# Altium PCB diplom.PcbDoc (part 1 of 2)
Units mm, origin at the board's own origin, x right, y up, seen from the top; angles counter-clockwise.
Board outline 160 x 160 mm, 2 copper layers (Top Layer, Bottom Layer), stack 1.099 mm thick; 231 components, 171 nets, 635 pads, 180 vias.
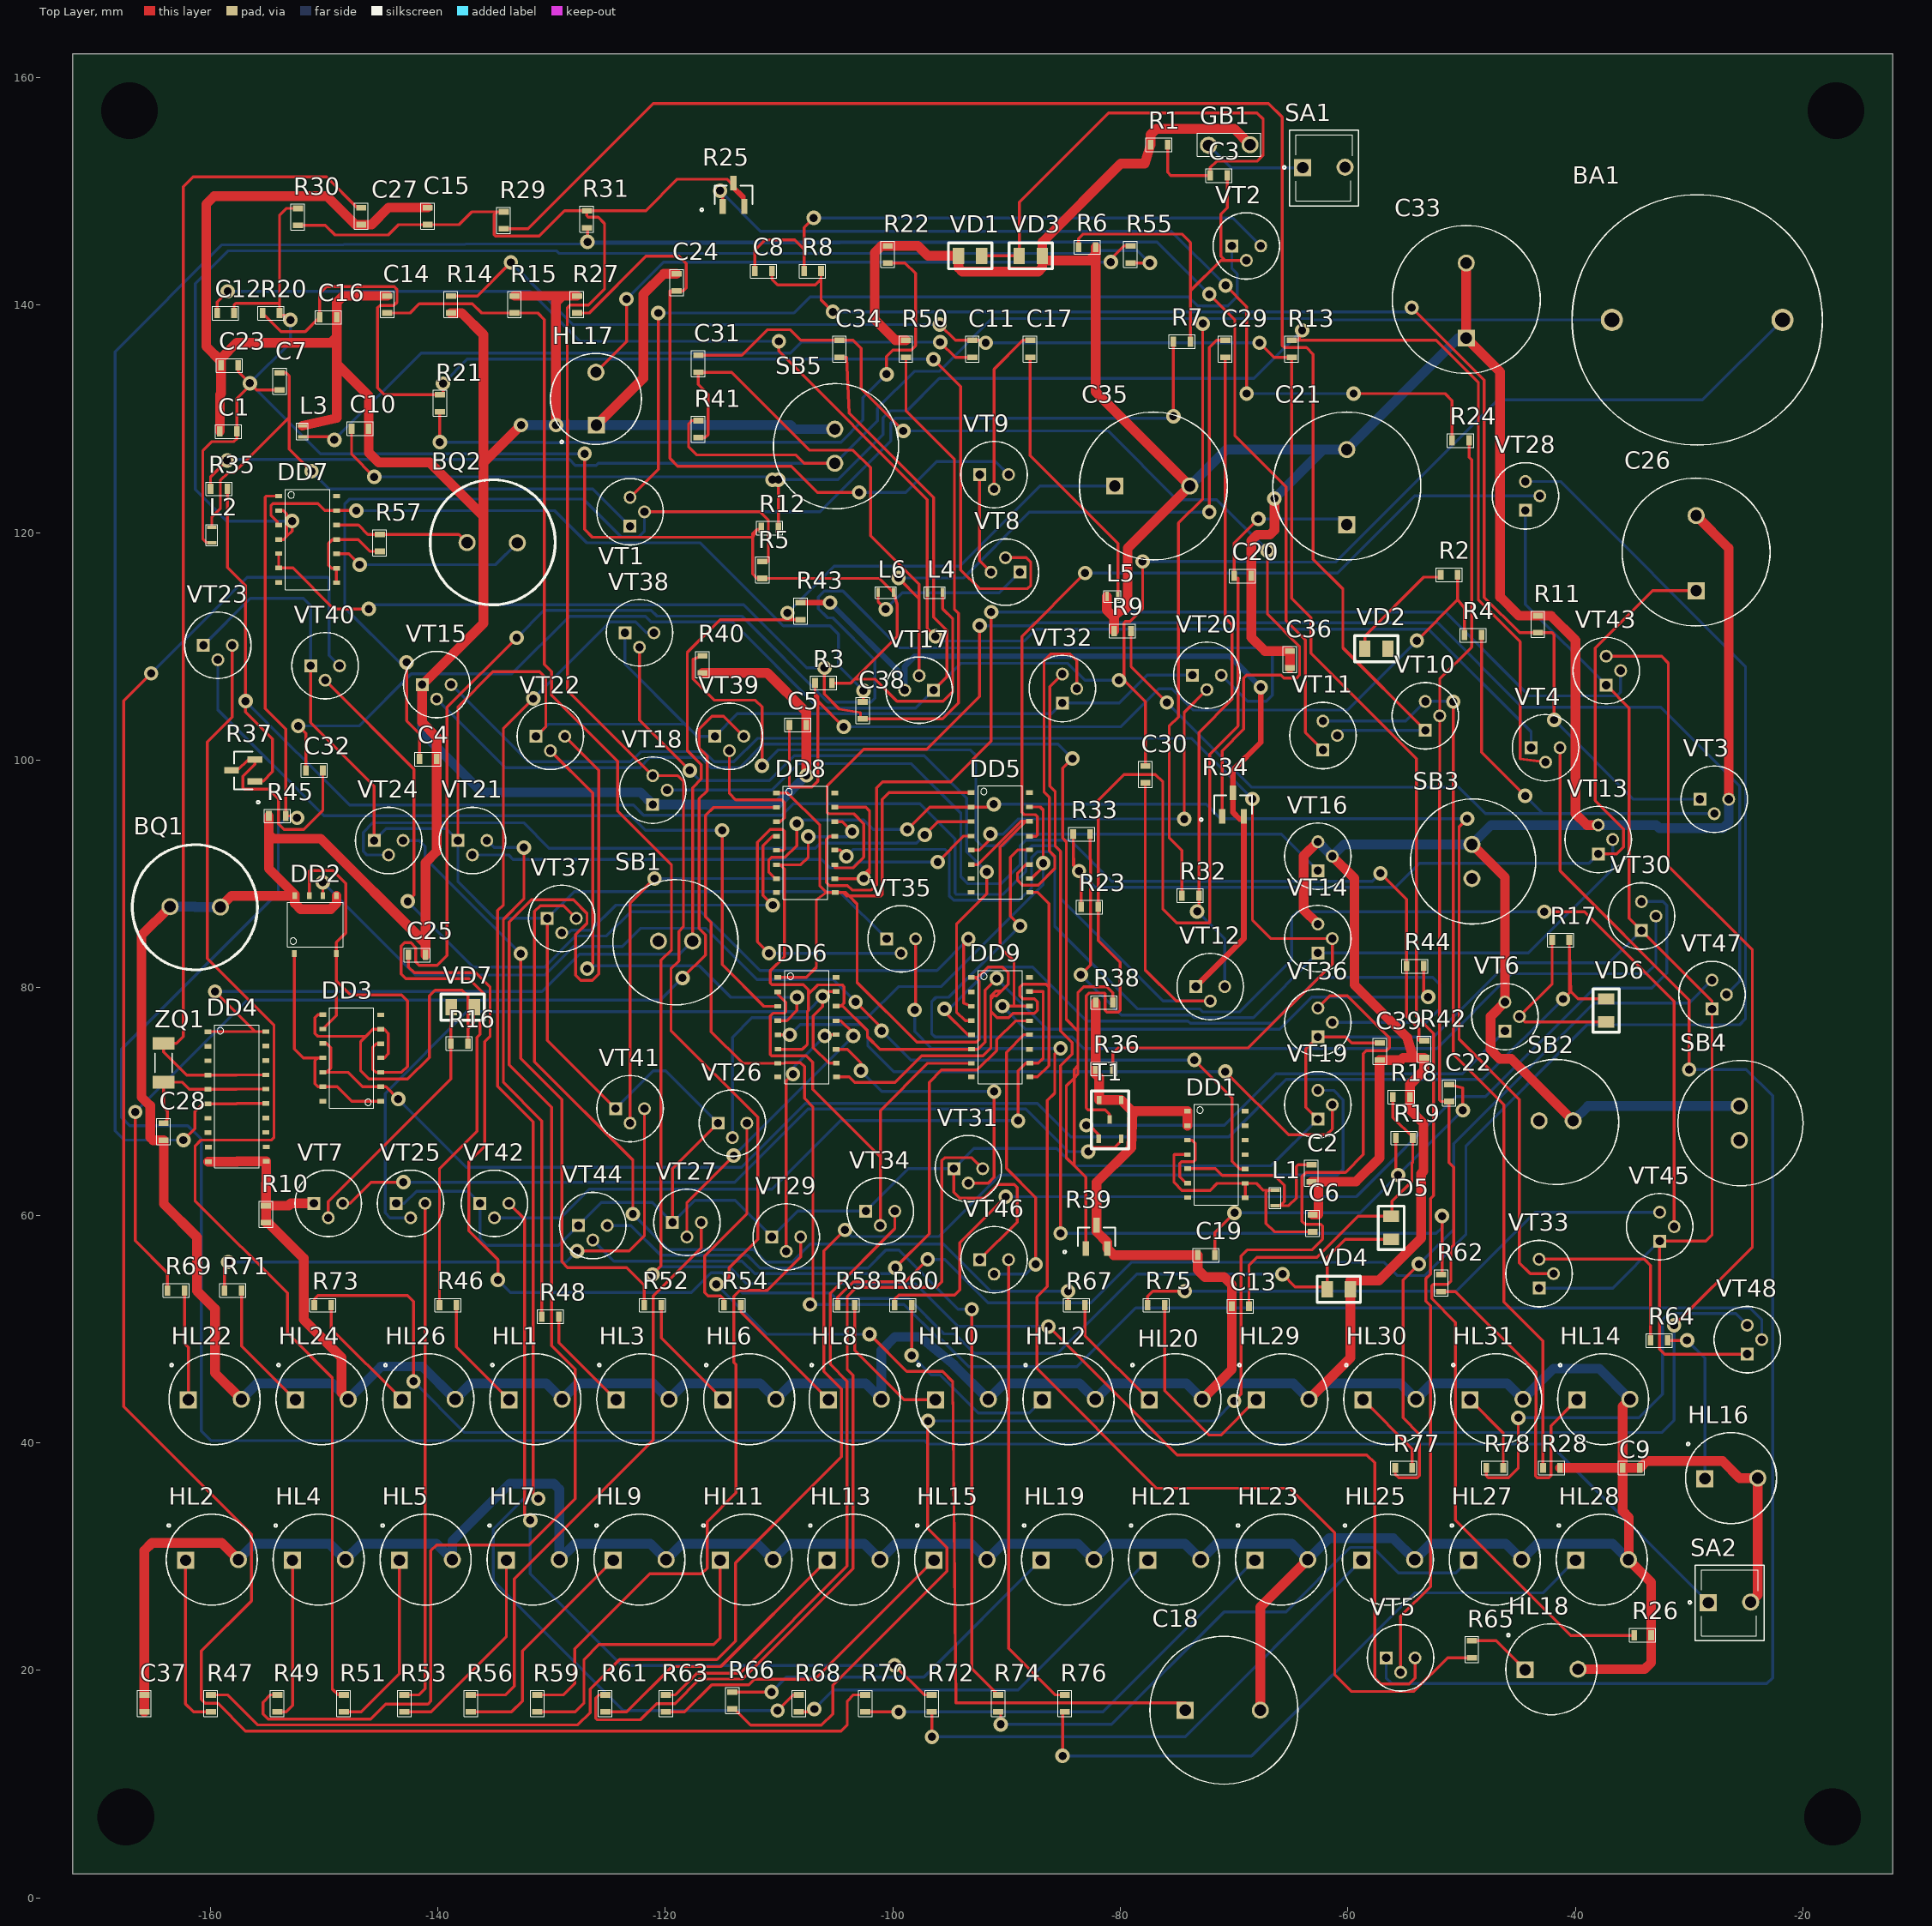
[diagram p0: Top Layer view]
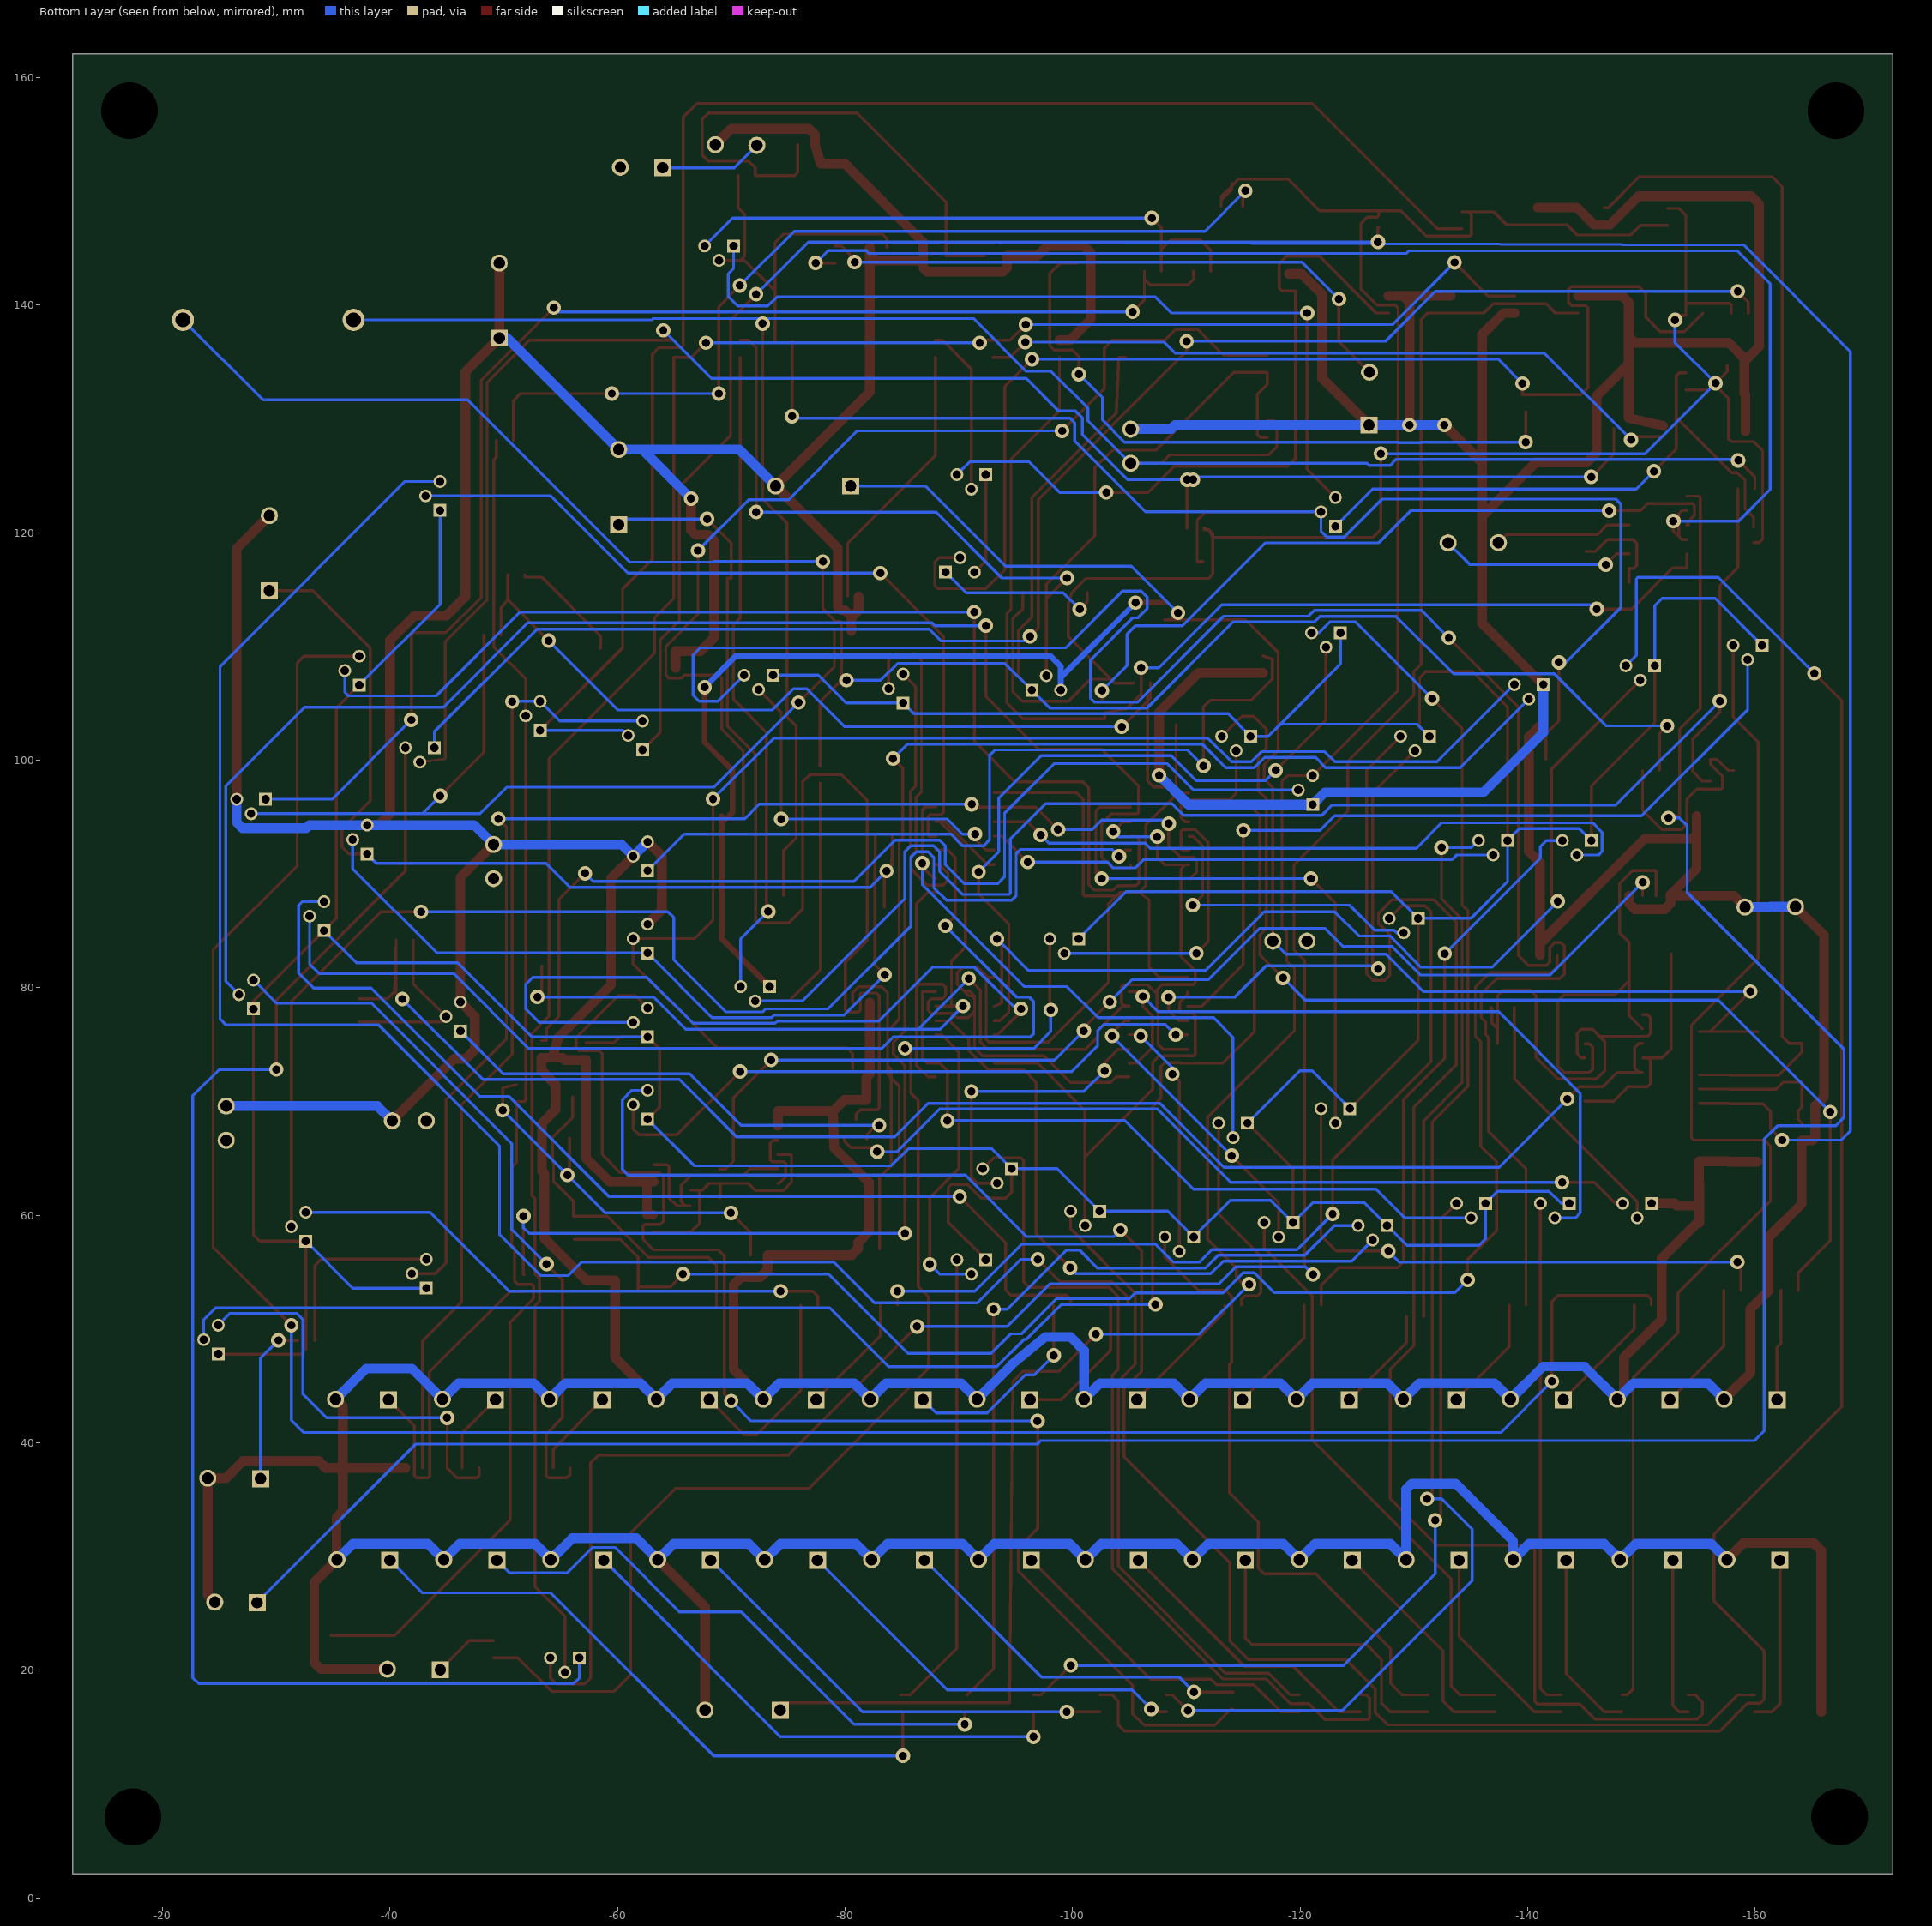
[diagram p1: Bottom Layer view, seen from below]

## Layer stack, top to bottom
Top Solder: solder mask 0.0102, Solder Resist, Dk 3.5
Top Layer: signal copper 0.105
Dielectric 1: core 0.889, Core-041, Dk 4.8
Bottom Layer: signal copper 0.105
Bottom Solder: solder mask 0.0102, Solder Resist, Dk 3.5

## Board outline
-172.1,2.1 -172.1,162.1 -12.1,162.1 -12.1,2.1

## Design rules (kind name [scope] priority, off if disabled: settings)
Clearance [All] p1: gap=0.254 ignorepadtopadclearanceinfootprint=FALSE except(0: Arc-Hole Track-Hole SMDPad-Hole THPad-Hole Via-Hole Fill-Hole Poly-Hole Region-Hole Text-Hole)
PolygonConnect [All] p1: connectstyle=Relief reliefconductorwidth=0.254 reliefentries=4 polygonreliefangle="90 Angle" airgapwidth=0.254
RoutingVias [All] p1: holewidth=0.711 width=1.27 viastyle="Through Hole" minholewidth=0.711 minwidth=1.27 maxholewidth=0.711 maxwidth=1.27
SolderMaskExpansion [All] p1: expansion=0.102 istentingtop=FALSE
Width Width_2 [InNet('No Net')] p1: maxlimit=0.15 minlimit=0.15 preferedwidth=0.15
Width Width_1 [InNet('+')] p2: maxlimit=0.85 minlimit=0.85 preferedwidth=0.85
Width [InNet('-4,5В')] p3: maxlimit=0.5 minlimit=0.15 preferedwidth=0.5
30 further rules are at their usual default settings.

## Components (designator, comment, footprint, x,y, rotation, side; value= is the part's Value field where it differs from the comment)
BA1 "DINAMYC" DINAMIK -29.3,138.7 r0 top
BQ1 "datchik" ZP-1 -161.425,87.125 r0 top
BQ2 "datchik" ZP-1 -135.1,119.1 r180 top
C1 "Cap" "SMD 0603" -158.4,128.9 r180 top
C2 "Cap" "SMD 0603" -63.2,63.7 r90 top
C3 "Cap" "SMD 0603" -71.35,151.4 r0 top
C4 "Cap" "SMD 0603" -140.85,100.1 r180 top
C5 "Cap" "SMD 0603" -108.35,103.1 r0 top
C6 "Cap" "SMD 0603" -63.1,59.3 r90 top
C7 "Cap" "SMD 0603" -153.9,133.3 r90 top
C8 "Cap" "SMD 0603" -111.375,142.992 r0 top
C9 "Cap" "SMD 0603" -35.1,37.8 r0 top
C10 "Cap" "SMD 0603" -146.821,129.144 r180 top
C11 "Cap" "SMD 0603" -93.003,136.157 r90 top
C12 "Cap" "SMD 0603" -158.65,139.3 r180 top
C13 "Cap" "SMD 0603" -69.451,52.01 r180 top
C14 "Cap" "SMD 0603" -144.431,140.057 r90 top
C15 "Cap" "SMD 0603" -140.882,147.821 r90 top
C16 "Cap" "SMD 0603" -149.621,138.932 r180 top
C17 "Cap" "SMD 0603" -87.923,136.157 r90 top
C18 "CapPlus" cap -70.9,16.5 r0 top
C19 "Cap" "SMD 0603" -72.45,56.5 r180 top
C20 "Cap" "SMD 0603" -69.25,116.2 r180 top
C21 "CapPlus" cap -60.1,124.1 r90 top
C22 "Cap" "SMD 0603" -51.1,70.75 r270 top
C23 "Cap" "SMD 0603" -158.3,134.7 r180 top
C24 "Cap" "SMD 0603" -119,142 r90 top
C25 "Cap" "SMD 0603" -141.821,82.88 r180 top
C26 "CapPlus" cap -29.4,118.3 r90 top
C27 "Cap" "SMD 0603" -146.724,147.821 r90 top
C28 "Cap" "SMD 0603" -164.1,67.35 r90 top
C29 "Cap" "SMD 0603" -70.778,136.157 r90 top
C30 "Cap" "SMD 0603" -77.8,98.75 r90 top
C31 "Cap" "SMD 0603" -117.1,134.85 r90 top
C32 "Cap" "SMD 0603" -150.85,99.1 r180 top
C33 "CapPlus" cap -49.6,140.5 r90 top
C34 "Cap" "SMD 0603" -104.687,136.157 r90 top
C35 "CapPlus" cap -77.1,124.1 r0 top
C36 "Cap" "SMD 0603" -65.1,108.85 r90 top
C37 "Cap" "SMD 0603" -165.784,17.1 r90 top
C38 "Cap" "SMD 0603" -102.64,104.379 r270 top
C39 "Cap" "SMD 0603" -57.2,74.4 r270 top
DD1 "dd" DIP14 -74.105,69.145 r0 top
DD2 "K561TM2" DD2 -152.6,83 r90 top
DD3 "К561ЛН2" DIP14 -145.02,70.03 r180 top
DD4 "AT89C2051" DD4 -160.205,76.125 r0 top
DD5 "К561ИР2" DIP16 -93.105,97.145 r0 top
DD6 "К561ИР2" DIP16 -110.1,80.91 r0 top
DD7 "dd" DIP14 -153.98,123.21 r0 top
DD8 "К561ИР2" DIP16 -110.225,97.125 r0 top
DD9 "К561ИР2" DIP16 -93.1,80.91 r0 top
GB1 "batareyka" BATAREIKA -52.875,155.1 r180 top
HL1 "sveto_diod" HL -131.397,43.833 r0 top
HL2 "sveto_diod" HL -159.839,29.733 r0 top
HL3 "sveto_diod" HL -121.999,43.833 r0 top
HL4 "sveto_diod" HL -150.441,29.733 r0 top
HL5 "sveto_diod" HL -141.043,29.733 r0 top
HL6 "sveto_diod" HL -112.601,43.833 r0 top
HL7 "sveto_diod" HL -131.645,29.733 r0 top
HL8 "sveto_diod" HL -103.33,43.833 r0 top
HL9 "sveto_diod" HL -122.247,29.733 r0 top
HL10 "sveto_diod" HL -93.932,43.833 r0 top
HL11 "sveto_diod" HL -112.849,29.733 r0 top
HL12 "sveto_diod" HL -84.534,43.833 r0 top
HL13 "sveto_diod" HL -103.451,29.733 r0 top
HL14 "sveto_diod" HL -37.544,43.833 r0 top
HL15 "sveto_diod" HL -94.053,29.733 r0 top
HL16 "sveto_diod" HL -26.3,36.9 r0 top
HL17 "sveto_diod" HL -126.1,131.775 r90 top
HL18 "sveto_diod" HL -42.1,20.1 r0 top
HL19 "sveto_diod" HL -84.655,29.733 r0 top
HL20 "sveto_diod" HL -75.136,43.833 r0 top
HL21 "sveto_diod" HL -75.257,29.733 r0 top
HL22 "sveto_diod" HL -159.591,43.833 r0 top
HL23 "sveto_diod" HL -65.859,29.733 r0 top
HL24 "sveto_diod" HL -150.193,43.833 r0 top
HL25 "sveto_diod" HL -56.461,29.733 r0 top
HL26 "sveto_diod" HL -140.795,43.833 r0 top
HL27 "sveto_diod" HL -47.063,29.733 r0 top
HL28 "sveto_diod" HL -37.665,29.733 r0 top
HL29 "sveto_diod" HL -65.738,43.833 r0 top
HL30 "sveto_diod" HL -56.34,43.833 r0 top
HL31 "sveto_diod" HL -46.942,43.833 r0 top
L1 "induktor_4" inductor -66.4,61.525 r90 top
L2 "induktor_4" inductor -159.856,119.792 r90 top
L3 "induktor_2" INDUCTOR_LOW -151.9,128.913 r90 top
L4 "induktor_4" inductor -96.304,114.744 r180 top
L5 "induktor_2" INDUCTOR_LOW -80.7,114.4 r180 top
L6 "induktor_4" inductor -100.622,114.744 r180 top
R1 "res" "SMD 0603" -76.6,154.1 r0 top
R2 "res" "SMD 0603" -51.1,116.3 r0 top
R3 "res" "SMD 0603" -106.083,106.792 r0 top
R4 "res" "SMD 0603" -49,111 r0 top
R5 "res" "SMD 0603" -111.456,116.728 r90 top
R6 "res" "SMD 0603" -82.921,145.092 r0 top
R7 "res" "SMD 0603" -74.588,136.792 r0 top
R8 "res" "SMD 0603" -107.057,142.992 r0 top
R9 "res" "SMD 0603" -79.808,111.355 r0 top
R10 "res" "SMD 0603" -155.1,60.1 r90 top
R11 "res" "SMD 0603" -43.3,111.95 r90 top
R12 "res" "SMD 0603" -110.821,120.411 r180 top
R13 "res" "SMD 0603" -64.936,136.157 r90 top
R14 "res" "SMD 0603" -138.843,140.057 r90 top
R15 "res" "SMD 0603" -133.255,140.057 r90 top
R16 "res" "SMD 0603" -138.1,75.1 r180 top
R17 "res" "SMD 0603" -41.3,84.2 r180 top
R18 "res" "SMD 0603" -55.3,70.4 r180 top
R19 "res" "SMD 0603" -55.05,66.8 r180 top
R20 "res" "SMD 0603" -154.65,139.3 r180 top
R21 "res" "SMD 0603" -139.805,131.379 r270 top
R22 "res" "SMD 0603" -100.447,144.457 r90 top
R23 "res" "SMD 0603" -82.7,87.1 r180 top
R24 "res" "SMD 0603" -50.1,128.1 r180 top
R25 "res_per" 21-0051H -114,149.7 r0 top
R26 "res" "SMD 0603" -34.1,23.1 r180 top
R27 "res" "SMD 0603" -127.767,140.057 r90 top
R28 "res" "SMD 0603" -42.1,37.8 r180 top
R29 "res" "SMD 0603" -134.2,147.45 r90 top
R30 "res" "SMD 0603" -152.3,147.75 r270 top
R31 "res" "SMD 0603" -126.9,147.55 r90 top
R32 "res" "SMD 0603" -73.85,88.1 r180 top
R33 "res" "SMD 0603" -83.4,93.5 r180 top
R34 "res_per" 21-0051H -70.1,96.1 r0 top
R35 "res" "SMD 0603" -159.221,123.856 r180 top
R36 "res" "SMD 0603" -81.421,72.867 r180 top
R37 "res_per" 21-0051H -157.1,99.1 r90 top
R38 "res" "SMD 0603" -81.421,78.709 r180 top
R39 "res_per" 21-0051H -82.1,58.1 r0 top
R40 "res" "SMD 0603" -116.726,108.421 r90 top
R41 "res" "SMD 0603" -117.1,129.1 r270 top
R42 "res" "SMD 0603" -53.3,74.6 r270 top
R43 "res" "SMD 0603" -108.1,113.1 r90 top
R44 "res" "SMD 0603" -54.1,81.9 r180 top
R45 "res" "SMD 0603" -154.1,95.1 r180 top
R46 "res" "SMD 0603" -139.1,52.1 r180 top
R47 "res" "SMD 0603" -159.942,17.1 r90 top
R48 "res" "SMD 0603" -130.1,51.1 r180 top
R49 "res" "SMD 0603" -154.1,17.1 r90 top
R50 "res" "SMD 0603" -98.845,136.157 r90 top
R51 "res" "SMD 0603" -148.258,17.1 r90 top
R52 "res" "SMD 0603" -121.1,52.1 r180 top
R53 "res" "SMD 0603" -142.924,17.1 r90 top
R54 "res" "SMD 0603" -114.1,52.1 r180 top
R55 "res" "SMD 0603" -79.111,144.457 r90 top
R56 "res" "SMD 0603" -137.082,17.1 r90 top
R57 "res" "SMD 0603" -145.1,119.1 r270 top
R58 "res" "SMD 0603" -104.1,52.1 r180 top
R59 "res" "SMD 0603" -131.24,17.1 r90 top
R60 "res" "SMD 0603" -99.1,52.1 r180 top
R61 "res" "SMD 0603" -125.271,17.1 r90 top
R62 "res" "SMD 0603" -51.8,54.05 r90 top
R63 "res" "SMD 0603" -119.937,17.1 r90 top
R64 "res" "SMD 0603" -32.65,49 r180 top
R65 "res" "SMD 0603" -49.1,21.85 r270 top
R66 "res" "SMD 0603" -114.1,17.35 r270 top
R67 "res" "SMD 0603" -83.85,52.1 r180 top
R68 "res" "SMD 0603" -108.253,17.1 r90 top
R69 "res" "SMD 0603" -163,53.4 r180 top
R70 "res" "SMD 0603" -102.411,17.1 r90 top
R71 "res" "SMD 0603" -158,53.4 r180 top
R72 "res" "SMD 0603" -96.569,17.1 r90 top
R73 "res" "SMD 0603" -150.1,52.1 r180 top
R74 "res" "SMD 0603" -90.727,17.1 r90 top
R75 "res" "SMD 0603" -76.85,52.1 r180 top
R76 "res" "SMD 0603" -84.885,17.1 r90 top
R77 "res" "SMD 0603" -55.1,37.8 r180 top
R78 "res" "SMD 0603" -47.1,37.8 r180 top
SA1 "key2" switch -62.1,152.1 r0 top
SA2 "key2" switch -26.45,25.975 r0 top
SB1 "key3" BUTTON -119.1,84.1 r0 top
SB2 "key3" BUTTON -41.7,68.3 r0 top
SB3 "key3" BUTTON -49.1,91.1 r90 top
SB4 "key3" BUTTON -25.6,68.1 r90 top
SB5 "key3" BUTTON -105.1,127.6 r90 top
T1 "transformator" TRANSFORMATOR4 -80.913,68.422 r90 top
VD1 "diod" res -93.208,144.33 r0 top
VD2 "diod" res -57.5,109.8 r0 top
VD3 "diod" res -87.874,144.33 r0 top
VD4 "diod" res -60.8,53.5 r0 top
VD5 "diod" res -56.2,58.9 r270 top
VD6 "diod" res -37.3,78 r90 top
VD7 "diod" res -137.802,78.294 r0 top
VT1 "TransistorNpN" Transistor -123.1,121.83 r90 top
VT2 "TransistorNpN" Transistor -68.93,145.2 r0 top
VT3 "TransistorNpN" Transistor -27.8,96.57 r0 top
VT4 "TransistorNpN" Transistor -42.63,101.1 r0 top
VT5 "TransistorNpN" Transistor -55.37,21.1 r0 top
VT6 "TransistorNpN" Transistor -46.2,77.47 r90 top
VT7 "TransistorNN" Transistor -149.624,61.049 r0 top
VT8 "TransistorNpN" Transistor -90.1,116.53 r180 top
VT9 "TransistorNpN" Transistor -91.1,125.1 r0 top
VT10 "TransistorNpN" Transistor -53.2,103.9 r90 top
VT11 "TransistorNpN" Transistor -62.2,102.17 r90 top
VT12 "TransistorNN" Transistor -72.1,80.1 r0 top
VT13 "TransistorPnP" Transistor -38,93.03 r90 top
VT14 "TransistorUNO" Transistor -62.643,84.321 r90 top
VT15 "TransistorNN" Transistor -140.094,106.643 r0 top
VT16 "TransistorUNO" Transistor -62.643,91.56 r90 top
VT17 "TransistorNpN" Transistor -97.687,106.157 r180 top
VT18 "TransistorPnP" Transistor -121.1,97.37 r90 top
VT19 "TransistorNpN" Transistor -62.643,69.716 r90 top
VT20 "TransistorNpN" Transistor -72.4,107.47 r0 top
VT21 "TransistorNpN" Transistor -136.953,92.942 r0 top
VT22 "TransistorNpN" Transistor -130.1,102.1 r0 top
VT23 "TransistorNpN" Transistor -159.33,110.1 r0 top
VT24 "TransistorNpN" Transistor -144.319,92.942 r0 top
VT25 "TransistorNpN" Transistor -142.385,61.049 r0 top
VT26 "TransistorNpN" Transistor -114.1,68.1 r0 top
VT27 "TransistorNpN" Transistor -118.1,59.37 r0 top
VT28 "TransistorNpN" Transistor -44.4,123.23 r90 top
VT29 "TransistorNpN" Transistor -109.37,58.1 r0 top
VT30 "TransistorNpN" Transistor -34.2,86.3 r90 top
VT31 "TransistorNpN" Transistor -93.37,64.1 r0 top
VT32 "TransistorNpN" Transistor -85.1,106.3 r90 top
VT33 "TransistorNpN" Transistor -43.2,54.87 r90 top
VT34 "TransistorNpN" Transistor -101.1,60.37 r0 top
VT35 "TransistorNpN" Transistor -99.27,84.3 r0 top
VT36 "TransistorNpN" Transistor -62.643,76.955 r90 top
VT37 "TransistorNpN" Transistor -129.1,86.1 r0 top
VT38 "TransistorNpN" Transistor -122.27,111.2 r0 top
VT39 "TransistorNpN" Transistor -114.37,102.1 r0 top
VT40 "TransistorNpN" Transistor -149.9,108.3 r0 top
VT41 "TransistorNpN" Transistor -123.1,69.37 r0 top
VT42 "TransistorNpN" Transistor -135.019,61.049 r0 top
VT43 "TransistorNpN" Transistor -37.3,107.87 r90 top
VT44 "TransistorNpN" Transistor -126.37,59.1 r0 top
VT45 "TransistorNpN" Transistor -32.6,59 r90 top
VT46 "TransistorNpN" Transistor -91.1,56.1 r0 top
VT47 "TransistorNpN" Transistor -28,79.4 r90 top
VT48 "TransistorNpN" Transistor -24.9,49.07 r90 top
ZQ1 "Resonator" ZQ -164.1,73.4 r90 top

## Footprints (in the part's own frame and the unit in brackets; to place one, negate y for a bottom-side part, rotate by r counter-clockwise, add the part's x,y. Pads: shape width x height; smd on the part's side, far side on the other; paste and mask are expansions set on the pad)
21-0051H [mil]
  rect 22x51 smd: 1(-37.4,-40.5) 2(37.4,-40.5) 3(0,40.5)
  silkscreen extent -115,-57 65,32
BATAREIKA [mm]
  round 1.5 hole 1: N(15.725,1) P(19.375,1.05)
  silkscreen extent 14.77,-0.02 20.35,2.03
BUTTON [mm]
  round 1.5 hole 1: 1(-1.5,0) 2(1.5,0)
  silkscreen extent -5.5,-5.6 5.5,5.4
cap [mm]
  rect 1.5x1.5 hole 1: 1(-3.4,0)
  round 1.5 hole 1: 2(3.2,0)
  silkscreen extent -6.5,-6.5 6.5,6.5
DD2 [mm]
  rect 0.6x0.4 smd: 1(0,0) 2(0,-3.7) 3(5.1,-2.5) 4(5.1,-3.7) 5(5.08,-1.31) 6(5.08,-0.04)
  silkscreen extent 0.6,-4.3 4.5,0.6
DD4 [mm]
  rect 0.6x0.4 smd: 1(0,0) 1(5.1,0.025) 2(0,-1.27) 2(5.1,-1.245) 3(0,-2.54) 3(5.1,-2.515) 4(0,-3.81) 4(5.1,-3.785) 5(0.005,-5.05) 5(5.105,-5.025) 6(0.005,-6.32) 6(5.105,-6.295) 7(0.005,-7.59) 7(5.105,-7.565) 8(0.005,-8.86) 8(5.105,-8.835) 9(0.03,-10.14) 9(5.13,-10.115) 10(0.03,-11.41) 10(5.13,-11.385)
  silkscreen extent 0.6,-11.95 4.5,0.6
DINAMIK [mm]
  round 1.95 hole 1.3: N(7.5,0) P(-7.5,0)
  silkscreen extent -11,-11 11,11
DIP14 [mm]
  rect 0.6x0.4 smd: 1(0,0) 2(0,-1.27) 3(0,-2.54) 4(0,-3.81) 5(0.005,-5.045) 6(0.005,-6.315) 7(0.005,-7.585) 8(5.08,-7.61) 9(5.08,-6.34) 10(5.08,-5.07) 11(5.08,-3.81) 12(5.08,-2.54) 13(5.08,-1.27) 14(5.08,0)
  silkscreen extent 0.6,-8.23 4.5,0.6
DIP16 [mm]
  rect 0.6x0.4 smd: 1(0,0) 2(0,-1.27) 3(0,-2.54) 4(0,-3.81) 5(0.005,-5.045) 6(0.005,-6.315) 7(0,-7.55) 8(0,-8.75) 9(5.15,-8.75) 10(5.13,-7.545) 11(5.125,-6.325) 12(5.125,-5.025) 13(5.125,-3.825) 14(5.125,-2.525) 15(5.125,-1.25) 16(5.125,0)
  silkscreen extent 0.6,-9.35 4.5,0.6
HL [mm]
  rect 1.5x1.5 hole 1: 1(-2.325,-0.05)
  round 1.5 hole 1: 2(2.325,0)
  silkscreen extent -4.02,-4 3.98,4
inductor [mm]
  rect 0.3x0.8 smd: 1(-0.675,0) 2(0.675,0)
  silkscreen extent -0.92,-0.5 0.92,0.5
INDUCTOR_LOW [mm]
  rect 0.3x0.8 smd: 1(-0.487,0) 2(0.487,0)
  silkscreen extent -0.74,-0.5 0.74,0.5
res [mm]
  rect 1x1.42 smd: 1(-1.016,0) 2(1.016,0)
  silkscreen extent -1.91,-1.14 1.9,1.14
"SMD 0603" [mm]
  rect 0.5x0.9 smd: 1(-0.75,0) 2(0.75,0)
  silkscreen extent -1.15,-0.6 1.15,0.6
switch [mm]
  rect 1.5x1.5 hole 1: 1(-1.875,-0.025)
  round 1.5 hole 1: 2(1.85,0.025)
  silkscreen extent -3.63,-3.38 3.03,3.27
TRANSFORMATOR4 [mm]
  rect 0.75x0.4 smd: 1(-1.712,0.988) 2(-1.712,-0.987) 3(1.712,-0.987) 4(1.712,0.963) 5(0.013,0.037)
  silkscreen extent -2.58,-1.64 2.51,1.64
Transistor [mm]
  rect 1.13x1.13 hole 0.73: 1(-1.27,0)
  round 1.13 hole 0.73: 2(0,-1.27) 3(1.27,0)
  silkscreen extent -2.92,-2.92 2.92,2.92
ZP-1 [mm]
  round 1.5 hole 1: 1(-2.1,0) 2(2.325,-0.025)
  silkscreen extent -5.42,-5.55 5.58,5.45
ZQ [mm]
  rect 1.1x1.9 smd: 1(-1.7,0) 2(1.7,0)
  silkscreen extent -0.83,-0.75 0.83,0.75

## Free pads (board coordinates)
  round 0 hole 5: ""(-167.407,7.127) ""(-167.1,157.1) ""(-17.407,7.127) ""(-17.1,157.1)

## Via types
v1: diameter 1.27, hole 0.711, Top Layer to Bottom Layer, 180 vias

## Nets (pads, with @x,y where several pads share a name; then routed paths per layer and width w, separated by ;. In a path a pad name is that pad's centre, name@x,y a point inside that pad or via, vN(x,y) a via of type N, cw(c..) or ccw(c..) an arc to the next point about the centre after c; other vN are vias at no path point)
+: BQ1.1 BQ1.2 C1.2 C2.1 C4.1 C5.2 C6.2 C9.1 C9.2 C10.1 C13.2 C14.2 C15.2 C16.1 C18.2 C19.2 C20.1 C21.2 C23.2 C24.2 C25.1 C26.2 C27.1 C28.1 C33.1 C33.2 C35.2 C36.1 C36.2 C37.1 C37.2 C39.2 DD1.1 DD1.2 DD2.4 DD2.6 DD4.10 GB1.N HL1.2 HL2.2 HL3.2 HL4.2 HL5.2 HL6.2 HL7.2 HL8.2 HL9.2 HL10.2 HL11.2 HL12.2 HL13.2 HL14.2 HL15.2 HL16.2 HL17.1 HL18.2 HL19.2 HL20.2 HL21.2 HL22.2 HL23.2 HL24.2 HL25.2 HL26.2 HL27.2 HL28.2 HL29.2 HL30.2 HL31.2 L3.2 L5.2 R1.1 R6.2 R9.1 R10.1 R10.2 R11.2 R14.1 R15.2 R18.1 R22.2 R26.1 R27.2 R28.1 R36.2 R38.2 R39.2 R39.3 R40.1 R42.2 R45.2 R50.2 SA2.2 SB2.2 SB3.2 SB4.2 SB5.2 T1.3 T1.4 VD1.1 VD3.2 VD4.2 VT3.3 VT6.3 VT7.1 VT13.3 VT14.3 VT15.1 VT16.2 VT16.3 VT18.1 | length 1259.1
  Top Layer w0.85: C37.1@-165.784,16.35 C37.2@-165.784,17.85 -165.803,17.85 -165.803,30.52 -165.118,31.206 -158.987,31.206 HL2.2@-157.514,29.733 ; BQ1.1@-163.525,87.125 -166.032,84.618 -166.032,70.391 -165.277,69.636 -165.277,66.861 -165.016,66.6 C28.1@-164.1,66.6 -164.076,66.6 -164.076,61 -161.155,58.079 -161.155,53.355 -159.58,51.78 -159.58,46.147 HL22.2@-157.266,43.833 ; DD4.10@-160.175,64.715 -157.65,64.715 -157.625,64.74 DD4.10@-155.075,64.74 -155.075,62.803 -155.1,62.778 R10.2@-155.1,60.85 ; C1.2@-159.15,128.9 -159.15,132.12 -159.05,132.22 C23.2@-159.05,134.7 C23.2@-159.05,135.066 ; BQ1.2@-159.1,87.1 -158.12,88.08 DD2.6@-152.56,88.08 ; R45.2@-154.85,95.1 -154.85,93.469 ; L3.2@-151.9,129.4 -148.871,130.088 -148.871,134.812 ; VT7.1@-150.894,61.049 -152.904,61.049 -153.103,60.85 R10.2@-155.1,60.85 ; DD2.4@-148.9,88.1 -148.9,87.416 -149.408,86.908 -152.052,86.908 -152.56,87.416 DD2.6@-152.56,88.08 ; HL24.2@-147.868,43.833 -148.455,44.42 -148.455,47.513 -151.783,50.84 -151.783,56.226 -154.907,59.35 R10.1@-155.1,59.35 R10.2@-155.1,60.85 ; C14.2@-144.431,140.807 -148.312,140.807 -148.871,140.248 C16.1@-148.871,138.932 -148.871,137.2 ; C25.1@-141.071,82.88 -141.071,83.893 ; C15.2@-140.882,148.57 -144.324,148.57 -145.824,147.07 C27.1@-146.724,147.07 -147.236,147.07 -149.735,149.57 -159.657,149.57 -160.342,148.884 -160.342,136.359 C23.2@-159.05,135.066 ; R14.1@-138.843,139.307 -137.889,139.307 -135.984,137.402 -135.984,126.151 ; R15.2@-133.255,140.807 -129.049,140.807 ; v1(-132.685,129.45) -135.984,126.151 ; v1(-129.608,129.45) -129.608,140.248 -129.049,140.807 ; R27.2@-127.767,140.807 -129.049,140.807 ; HL17.1@-126.05,129.45 -121.931,133.569 -121.931,140.953 -120.134,142.75 C24.2@-119,142.75 ; R40.1@-116.726,107.671 -111.041,107.671 -107.6,104.231 C5.2@-107.6,103.1 v1(-107.6,98.668) ; R50.2@-98.845,136.907 -99.763,136.907 -101.592,138.736 -101.592,144.623 -101.008,145.207 R22.2@-100.447,145.207 -97.782,145.207 -96.905,144.33 VD1.1@-94.224,144.33 -94.224,143.268 -93.896,142.94 -87.214,142.94 -86.858,143.296 VD3.2@-86.858,143.931 ; R38.2@-82.172,78.709 R36.2@-82.172,72.867 -82.172,72.406 -81.876,72.111 T1.4@-81.876,70.135 T1.3@-79.926,70.135 -78.937,69.145 ; R6.2@-82.171,145.092 -82.171,144.48 ; L5.2@-81.187,114.4 -81.187,113.191 -80.558,112.562 ; R9.1@-80.558,111.355 -80.558,112.562 ; DD1.2@-74.105,67.875 DD1.1@-74.105,69.145 -78.937,69.145 ; HL20.2@-72.811,43.833 -70.201,46.443 -70.201,53.888 -70.887,54.574 -72.56,54.574 -73.2,55.214 C19.2@-73.2,56.5 -80.579,56.5 R39.2@-81.15,57.071 -81.15,57.622 -82.1,58.572 R39.3@-82.1,59.129 -82.1,62.89 -79.037,65.953 -78.937,69.145 ; GB1.N@-68.6,154.1 -69.988,155.488 -76.842,155.488 -77.35,154.98 R1.1@-77.35,154.1 -77.858,152.44 -79.951,152.44 -86.858,145.533 VD3.2@-86.858,144.33 VD3.2@-86.858,143.931 ; C18.2@-67.7,16.5 -67.7,25.567 HL23.2@-63.534,29.733 ; v1(-66.464,123.001) -66.464,120.211 -66.845,119.831 -67.967,119.831 -68.5,119.298 C20.1@-68.5,116.2 -68.5,110.798 -67.302,109.6 C36.2@-65.1,109.6 C36.1@-65.1,108.1 ; HL29.2@-63.413,43.833 -59.784,47.462 VD4.2@-59.784,53.5 -59.784,54.269 -57.278,54.269 -53.57,57.977 -53.57,63.66 -53.358,63.872 -53.358,68.087 -54.55,69.279 R18.1@-54.55,70.4 -54.55,71.49 -53.3,72.74 R42.2@-53.3,73.85 -54.272,73.85 ; C2.1@-63.2,62.95 -62.594,62.95 ; C6.2@-63.1,60.05 -62.594,60.05 -62.594,62.95 ; VT14.3@-62.643,85.591 -63.899,86.846 -63.899,91.575 VT16.3@-62.643,92.83 ; VT16.2@-61.373,91.56 -59.428,89.615 -59.428,80.252 -54.78,75.604 -54.272,73.85 ; C33.2@-49.6,143.7 C33.1@-49.6,137.1 -46.622,134.122 -46.622,114.347 -44.976,112.7 R11.2@-43.3,112.7 -42.156,112.7 -39.997,110.541 -39.997,95.297 -39,94.3 VT13.3@-38,94.3 ; SB3.2@-49.1,92.6 -46.2,89.7 VT6.3@-46.2,78.74 -47.465,77.475 -47.465,74.557 -46.652,73.744 -45.644,73.744 SB2.2@-40.2,68.3 ; R28.1@-41.35,37.8 C9.1@-35.85,37.8 ; HL18.2@-39.775,20.1 -33.933,20.1 -33.35,20.683 R26.1@-33.35,23.1 -33.35,27.743 HL28.2@-35.34,29.733 -35.3,29.773 -35.3,33.452 -35.85,34.002 C9.1@-35.85,37.8 ; HL14.2@-35.219,43.833 -35.85,43.202 C9.1@-35.85,37.8 ; C26.2@-29.4,121.5 -26.53,118.63 VT3.3@-26.53,96.57 ; SA2.2@-24.6,26 -23.975,26.625 HL16.2@-23.975,36.9 -25.575,36.9 -27.069,38.394 -33.756,38.394 C9.2@-34.35,37.8 C9.1@-35.85,37.8 ; C23.2@-159.05,135.066 -159.05,135.317 -157.675,136.692 -149.379,136.692 -148.871,137.2 ; -154.85,93.469 -154.85,90.468 -152.56,88.178 DD2.6@-152.56,88.08 ; -154.85,93.469 -154.489,93.107 -150.286,93.107 -141.071,83.893 ; -148.871,134.812 -148.871,137.2 ; -148.871,134.812 -146.071,132.012 C10.1@-146.071,129.144 -146.071,127.037 -145.204,126.17 -140.701,126.17 -135.984,121.452 ; -141.071,83.893 -141.071,90.997 -140.1,91.968 C4.1@-140.1,100.1 -140.1,102.048 -141.364,103.312 VT15.1@-141.364,106.643 -135.984,112.024 -135.984,121.452 ; -135.984,121.452 -135.984,126.151 ; VD3.2@-86.858,143.931 -82.72,143.931 -82.171,144.48 ; -82.171,144.48 -82.171,132.371 C35.2@-73.9,124.1 -79.367,118.633 -79.367,113.502 -79.672,113.197 -79.976,113.197 -80.558,112.615 -80.558,112.562 ; -62.594,62.95 -59.301,62.95 -57.218,65.033 -57.218,73.65 C39.2@-57.2,73.65 -55.364,73.65 -55.164,73.85 -54.272,73.85
  Bottom Layer w0.85: BQ1.1@-163.525,87.125 -161.333,87.125 -161.308,87.1 BQ1.2@-159.1,87.1 ; HL2.2@-157.514,29.733 -156.117,31.13 -149.513,31.13 HL4.2@-148.116,29.733 -146.719,31.13 -140.115,31.13 HL5.2@-138.718,29.733 -138.718,31.366 -133.671,36.414 -129.8,36.414 -129.32,35.933 HL7.2@-129.32,29.733 -127.923,31.13 -121.319,31.13 HL9.2@-119.922,29.733 -118.525,31.13 -111.921,31.13 HL11.2@-110.524,29.733 -109.127,31.13 -102.523,31.13 HL13.2@-101.126,29.733 -99.729,31.13 -93.125,31.13 HL15.2@-91.728,29.733 -90.331,31.13 -83.727,31.13 HL19.2@-82.33,29.733 -80.933,31.13 -74.329,31.13 HL21.2@-72.932,29.733 -71.535,31.13 -64.931,31.13 HL23.2@-63.534,29.733 -61.647,31.62 -56.023,31.62 HL25.2@-54.136,29.733 -52.739,31.13 -46.135,31.13 HL27.2@-44.738,29.733 -43.341,31.13 -36.737,31.13 HL28.2@-35.34,29.733 ; HL22.2@-157.266,43.833 -155.872,45.227 -149.262,45.227 HL24.2@-147.868,43.833 -144.983,46.718 -141.355,46.718 HL26.2@-138.47,43.833 -137.076,45.227 -130.466,45.227 HL1.2@-129.072,43.833 -127.678,45.227 -121.068,45.227 HL3.2@-119.674,43.833 -118.28,45.227 -111.67,45.227 HL6.2@-110.276,43.833 -108.882,45.227 -102.399,45.227 HL8.2@-101.005,43.833 -101.005,48.125 -99.814,49.316 -97.598,49.316 -94.651,46.877 HL10.2@-91.607,43.833 -90.213,45.227 -83.603,45.227 HL12.2@-82.209,43.833 -80.815,45.227 -74.205,45.227 HL20.2@-72.811,43.833 -71.417,45.227 -64.807,45.227 HL29.2@-63.413,43.833 -62.019,45.227 -55.409,45.227 HL30.2@-54.015,43.833 -52.621,45.227 -46.011,45.227 HL31.2@-44.617,43.833 -41.928,46.522 -37.908,46.522 HL14.2@-35.219,43.833 ; VT15.1@-141.364,106.643 -141.364,102.423 -136.111,97.17 -122.17,97.17 VT18.1@-121.1,96.1 -110.168,96.1 v1(-107.6,98.668) ; v1(-132.685,129.45) v1(-129.608,129.45) HL17.1@-126.05,129.45 -109.006,129.45 -108.656,129.1 SB5.2@-105.1,129.1 ; C35.2@-73.9,124.1 -70.7,127.3 -62.165,127.3 ; v1(-66.464,123.001) -62.165,127.3 ; VT16.3@-62.643,92.83 -62.643,92.819 -61.384,91.56 VT16.2@-61.373,91.56 -60.334,92.6 SB3.2@-49.1,92.6 -47.4,94.3 VT13.3@-38,94.3 -32.911,94.3 -32.631,94.02 -27.038,94.02 -26.53,94.528 VT3.3@-26.53,96.57 ; C33.1@-49.6,137.1 -50.3,137.1 C21.2@-60.1,127.3 -62.165,127.3 ; SB2.2@-40.2,68.3 -38.9,69.6 SB4.2@-25.6,69.6
-4,5В: R34.2 R34.3 R43.2 VT12.1 VT17.3 | length 76.7
  Top Layer w0.5: R43.2@-108.1,113.85 v1(-105.529,113.85) ; VT12.1@-73.37,80.1 -69.15,84.32 R34.2@-69.15,94.82 ; R34.2@-69.15,95.071 R34.2@-69.15,94.82 ; v1(-67.658,106.415) -67.658,101.564 -70.1,99.122 R34.3@-70.1,97.129 -70.1,95.408 -69.512,94.82 R34.2@-69.15,94.82
  Bottom Layer w0.5: v1(-105.529,113.85) -98.957,107.278 ; VT17.3@-98.957,106.157 -98.957,107.278 ; v1(-67.658,106.415) -70.39,109.147 -98.054,109.147 -98.957,108.244 -98.957,107.278
NetBA1_N: BA1.N C30.2 C32.2 C34.1 VT17.1 | length 205
  Top Layer w0.254: v1(-152.265,103.012) -151.6,102.346 C32.2@-151.6,99.1 ; C34.1@-104.687,135.407 -104.056,135.407 -103.827,130.494 -96.417,123.084 -96.417,112.566 -95.242,111.391 -95.242,107.332 VT17.1@-96.417,106.157 ; v1(-80.129,107.025) v1@-79.689,107.025 ; v1(-78.046,117.464) -78.046,113.304 -79.164,112.187 -79.556,112.187 -79.689,112.054 v1@-79.689,107.025 ; C30.2@-77.8,99.5 -77.792,99.5 -77.792,105.128 v1@-79.689,107.025
  Bottom Layer w0.254: v1(-152.265,103.012) -146.912,103.012 -142.334,107.59 -133.489,107.59 -128.424,112.654 -121.744,112.654 -121.246,112.156 -114.104,112.156 -106.534,104.586 -97.988,104.586 VT17.1@-96.417,106.157 -94.058,108.516 -84.618,108.516 -83.126,107.025 v1(-80.129,107.025) ; v1(-78.046,117.464) -68.445,117.464 -68.394,117.413 -61.079,117.413 -46.83,131.663 -28.837,131.663 BA1.N@-21.8,138.7
NetBA1_P: BA1.P R32.2 R35.2 R41.1 SB5.1 | length 200.1
  Top Layer w0.254: R35.2@-159.971,123.856 -159.971,124.897 v1(-158.514,126.354) ; R41.1@-117.1,129.85 -117.68,129.85 -117.95,129.58 -117.95,127.523 -117.264,126.837 -108.533,126.837 -107.796,126.1 SB5.1@-105.1,126.1 ; R32.2@-74.6,88.1 -74.6,92.072 -75.71,93.182 -75.71,102.986 -74.897,103.799 -74.897,120.842 -72.763,122.976 v1(-72.763,138.368)
  Bottom Layer w0.254: v1(-158.514,126.354) -158.44,126.428 -128.425,126.428 -127.92,125.922 -126.066,125.922 -125.888,126.1 SB5.1@-105.1,126.1 -101.363,129.837 -101.363,130.942 -98.127,134.178 -95.928,134.178 -91.288,138.818 -72.313,138.818 ; v1(-72.763,138.368) -72.313,138.818 ; BA1.P@-36.8,138.7 -63.016,138.7 -63.134,138.818 -72.313,138.818
NetBQ2_1: BQ2.1 DD7.10 | length 17.1
  Top Layer w0.254: DD7.10@-148.9,118.14 -147.82,118.14 v1(-146.865,117.185)
  Bottom Layer w0.254: v1(-146.865,117.185) -134.915,117.185 BQ2.1@-133,119.1
NetBQ2_2: BQ2.2 DD7.12 R57.1 | length 12.1
  Top Layer w0.254: DD7.12@-148.9,120.67 -146.965,120.67 -146.145,119.85 R57.1@-145.1,119.85 -138.15,119.85 BQ2.2@-137.425,119.125
NetC1_1: C1.1 C7.1 C12.1 C23.1 L2.1 L4.1 L6.1 R3.2 R5.1 R12.2 R20.1 R30.1 | length 148.6
  Top Layer w0.254: L2.1@-159.856,119.117 -160.344,119.117 -160.647,119.42 -160.647,127.212 -159.854,128.005 -157.904,128.005 -157.65,128.259 C1.1@-157.65,128.9 -157.65,131.788 v1@-156.404,133.033 ; C12.1@-157.9,139.3 -157.9,139.994 -157.748,140.146 -154.052,140.146 -153.9,139.994 ; C23.1@-157.55,134.7 -157.55,134.179 v1(-156.507,133.136) v1@-156.404,133.033 ; C7.1@-153.9,132.55 -155.921,132.55 v1@-156.404,133.033 ; v1(-152.951,138.699) -153.357,139.105 -153.9,139.105 R20.1@-153.9,139.3 -153.9,139.994 ; R30.1@-152.3,148.5 -153.332,148.5 -153.9,147.932 -153.9,139.994 ; v1(-127.094,126.938) -127.094,120.284 -126.408,119.598 -112.311,119.598 ; R3.2@-105.333,106.792 -105.333,106.771 -103.706,106.771 -103.351,107.126 ; L4.1@-95.629,114.744 -95.629,113.304 -94.734,112.41 -94.734,106.06 -95.598,105.196 -99.636,105.196 -101.567,107.126 -103.351,107.126 ; -112.311,119.598 -112.311,119.928 -112.006,120.233 ; -112.311,119.598 -112.311,116.359 -111.93,115.978 R5.1@-111.456,115.978 -101.181,115.978 L6.1@-99.947,114.744 -99.611,113.699 -99.611,110.866 -103.351,107.126 ; -112.311,119.598 -112.006,120.233 ; -112.006,120.233 -111.571,120.233 R12.2@-111.571,120.411 -112.006,120.233
  Bottom Layer w0.254: v1(-152.951,138.699) -152.951,136.692 v1(-156.507,133.136) -150.309,126.938 v1(-127.094,126.938)
NetC2_2: C2.2 DD1.5 L1.1 | length 17.3
  Top Layer w0.254: DD1.5@-74.1,64.1 -71.647,64.1 -71.036,63.489 -66.464,63.489 -65.6,62.626 -65.6,61.206 -65.956,60.85 ; L1.1@-66.4,60.85 -65.956,60.85 ; C2.2@-63.2,64.45 -64.366,64.45 -64.539,64.277 -64.539,61.508 -65.197,60.85 -65.956,60.85
NetC3_1: C3.1 R1.2 VD1.2 VD3.1 | length 48.2
  Top Layer w0.254: VD1.2@-92.192,144.33 VD3.1@-88.89,144.33 -88.89,149.039 -81.044,156.885 -67.988,156.885 -67.455,156.352 -67.455,153.177 -67.988,152.643 -71.544,152.643 -72.1,152.087 C3.1@-72.1,151.4 -72.1,151.399 -75.571,151.399 -75.85,151.678 R1.2@-75.85,154.1
NetC3_2: C3.2 R6.1 R7.2 VT2.2 | length 33.6
  Top Layer w0.254: R6.1@-83.671,145.092 -83.671,145.836 -83.265,146.242 -74.592,146.242 -73.838,145.488 -73.838,141.266 ; R7.2@-73.838,136.792 -73.838,140.6 -73.838,141.266 ; C3.2@-70.6,151.4 -70.6,148.554 -71.163,147.991 -71.163,144.311 -70.782,143.93 ; VT2.2@-68.93,143.93 -70.782,143.93 ; -73.838,141.266 -71.174,143.93 -70.782,143.93
NetC4_2: C4.2 R5.2 R7.1 VT1.2 | length 128.1
  Top Layer w0.254: v1(-142.74,108.6) -142.74,103.466 -141.6,102.326 C4.2@-141.6,100.1 ; VT1.2@-121.83,121.83 -111.676,121.83 -110.939,121.093 -110.939,117.478 R5.2@-111.456,117.478 ; v1(-75.338,130.231) R7.1@-75.338,136.792
  Bottom Layer w0.254: v1(-142.74,108.6) -143.373,108.6 -148.176,113.402 -148.176,122.519 -147.744,122.951 -127.205,122.951 -123.868,119.614 -122.344,119.614 -121.83,120.128 VT1.2@-121.83,121.83 -106.396,121.83 -100.185,128.04 -100.185,129.651 -99.789,130.048 -75.521,130.048 v1(-75.338,130.231)
NetC5_1: C5.1 R2.2 R3.1 R4.1 | length 86.5
  Top Layer w0.254: C5.1@-109.1,103.1 -109.1,97.746 -108.987,97.633 -107.104,97.633 -106.584,98.153 -106.584,105.201 ; R3.1@-106.833,106.792 -106.833,105.833 ; v1(-104.318,102.935) -106.584,105.201 ; v1(-53.942,110.505) -50.35,114.096 ; R2.2@-50.35,116.3 -50.35,114.096 ; R4.1@-49.75,111 -49.75,113.349 -50.35,114.096 ; -106.833,105.833 -106.833,105.45 -106.584,105.201 ; -106.833,105.833 -106.584,105.584 -106.584,105.201
  Bottom Layer w0.254: v1(-104.318,102.935) -79.977,102.935 -76.624,106.288 -75.456,106.288 -73.576,104.409 -60.038,104.409 v1(-53.942,110.505)
NetC6_1: C6.1 DD1.4 DD1.8 DD1.9 L1.2 | length 22
  Top Layer w0.254: DD1.4@-74.105,65.335 -75.255,65.335 -75.289,65.301 -75.289,62.892 -74.592,62.195 -72.115,62.195 -71.505,62.805 DD1.9@-69.025,62.805 ; DD1.8@-69.025,61.535 DD1.9@-69.025,62.805 ; L1.2@-66.4,62.2 -67.017,62.2 ; C6.1@-63.1,58.55 -66.464,58.55 -67.201,59.287 -67.201,62.016 -67.017,62.2 ; DD1.9@-69.025,62.805 -68.039,62.805 -67.434,62.2 -67.017,62.2
NetC7_2: C7.2 L2.2 VT1.1 | length 52.9
  Top Layer w0.254: L2.2@-159.856,120.467 -159.86,120.467 -159.86,121.35 -159.11,122.101 -159.11,124.578 -158.412,125.276 -157.904,125.276 -153.053,130.127 ; C7.2@-153.9,134.05 -153.332,134.05 -153.053,133.771 -153.053,130.127 ; v1(-151.097,125.389) -153.053,127.345 -153.053,130.127
  Bottom Layer w0.254: v1(-151.097,125.389) -149.535,123.827 -126.367,123.827 VT1.1@-123.1,120.56
NetC8_1: C8.1 R8.1 VT2.3 | length 52.2
  Top Layer w0.254: C8.1@-112.125,142.992 -112.125,144.82 -111.211,145.734 -108.628,145.734 -107.807,144.913 ; R8.1@-107.807,142.992 -107.807,144.913 ; v1(-106.952,147.665) -107.807,146.809 -107.807,144.913
  Bottom Layer w0.254: v1(-106.952,147.665) -70.125,147.665 VT2.3@-67.66,145.2
NetC8_2: C8.2 R8.2 R11.1 VT3.1 | length 119.3
  Top Layer w0.254: C8.2@-110.625,142.992 -110.625,142.28 -110.117,141.772 -106.815,141.772 -106.307,142.28 ; R8.2@-106.307,142.992 -106.307,142.28 ; v1(-105.274,139.414) -106.307,140.447 -106.307,142.28 ; v1(-54.393,139.773) -48.02,133.4 -48.02,114.31 -44.91,111.2 R11.1@-43.3,111.2 -42.055,111.2 -41.877,111.022 v1(-41.877,103.545)
  Bottom Layer w0.254: v1(-105.274,139.414) -54.753,139.414 v1(-54.393,139.773) ; v1(-41.877,103.545) -34.902,96.57 VT3.1@-29.07,96.57
NetC10_2: C10.2 R12.1 R13.2 VT4.2 | length 153.2
  Top Layer w0.254: C10.2@-147.571,129.144 -147.571,126.892 v1(-145.585,124.906) ; v1(-110.584,124.652) v1@-110.071,124.139 ; R12.1@-110.071,120.411 v1@-110.071,124.139 ; v1(-110.071,124.657) v1@-110.071,124.139 ; R13.2@-64.936,136.907 -64.319,136.907 ; v1(-64.026,137.784) -64.319,136.907 ; VT4.2@-42.63,99.83 -44.849,100.116 -44.849,110.403 -48.532,114.086 -48.532,133.193 -52.245,136.907 -64.319,136.907
  Bottom Layer w0.254: v1(-145.585,124.906) -110.838,124.906 v1(-110.584,124.652) ; v1(-110.071,124.657) -104.813,124.657 -100.851,128.619 -100.851,130.088 -100.226,130.714 -98.756,130.714 -95.91,133.56 -68.25,133.56 v1(-64.026,137.784)
NetC11_1: C11.1 L3.1 | length 63.1
  Top Layer w0.254: L3.1@-151.9,128.425 -149.358,128.425 v1(-149.09,128.158) ; v1(-95.841,136.743) -94.506,135.407 C11.1@-93.003,135.407
  Bottom Layer w0.254: v1(-149.09,128.158) -141.453,135.794 -109.009,135.794 -108.061,136.743 v1(-95.841,136.743)
NetC11_2: C11.2 R13.1 R14.2 VT5.2 | length 200.9
  Top Layer w0.254: R14.2@-138.843,140.807 -136.517,140.807 v1(-133.571,143.753) ; v1(-95.885,138.287) -94.506,136.907 C11.2@-93.003,136.907 -92.054,136.907 v1(-91.839,136.692) ; v1(-67.774,136.692) -66.489,135.407 R13.1@-64.94,135.407 ; R13.1@-64.936,135.407 R13.1@-64.94,135.407 ; VT5.2@-55.37,19.83 -55.37,24.748 -52.748,27.37 -52.748,52.063 -53.139,52.454 -53.139,54.439 -52.748,54.83 -52.748,61.457 -52.469,61.737 -52.469,75.986 -53.993,77.51 -53.993,100.143 -63.238,109.389 -63.238,112.528 -64.94,114.229 R13.1@-64.94,135.407
  Bottom Layer w0.254: v1(-133.571,143.753) -128.105,138.287 v1(-95.885,138.287) ; v1(-91.839,136.692) v1(-67.774,136.692)
NetC12_2: C12.2 L4.2 VT4.1 | length 142.3
  Top Layer w0.254: C12.2@-159.4,139.3 -159.4,140.276 v1(-158.463,141.213) ; v1(-110.025,136.819) -110.025,135.955 -96.979,122.909 L4.2@-96.979,114.744 -96.979,111.606 v1(-96.258,110.886)
  Bottom Layer w0.254: v1(-158.463,141.213) -131.894,141.213 -127.5,136.819 v1(-110.025,136.819) ; v1(-96.258,110.886) -95.852,110.479 -88.435,110.479 -87.394,111.521 -52.926,111.521 -43.9,102.495 VT4.1@-43.9,101.1
NetC13_1: C13.1 R18.2 R19.1 VD5.1 | length 29.9
  Top Layer w0.254: C13.1@-68.701,52.01 -68.701,55.588 -67.988,56.301 -62.73,56.301 -59.115,59.916 VD5.1@-56.2,59.916 -56.126,59.916 -56.126,61.231 -54.376,62.981 -54.376,64.602 -54.3,64.678 R19.1@-54.3,66.8 -54.3,66.845 -56.05,68.595 R18.2@-56.05,70.4
NetC14_1: C14.1 R15.1 VT5.3 | length 199.5
  Top Layer w0.254: C14.1@-144.431,139.307 -142.437,139.307 -141.623,140.121 -136.949,140.121 -136.135,139.307 R15.1@-133.255,139.307 -131.207,139.307 -130.624,138.724 -130.624,108.422 -129.989,107.787 -129.989,105.704 -124.198,99.913 -124.198,95.544 -119.456,90.801 -119.456,83.338 -120.376,82.417 -120.376,55.551 v1(-121.125,54.802) ; v1(-86.327,50.23) -75.024,38.927 -58.336,38.927 -57.65,38.242 -57.65,19.344 -57.117,18.811 -54.633,18.811 -54.1,19.344 VT5.3@-54.1,21.1
  Bottom Layer w0.254: v1(-121.125,54.802) -120.464,55.463 -114.353,55.463 -112.88,53.99 -98.018,53.99 -94.259,50.23 v1(-86.327,50.23)
NetC15_1: C15.1 C18.1 R25.2 R25.3 R29.2 R30.2 R31.2 VT18.3 | length 231
  Top Layer w0.254: R30.2@-152.3,147 -149.873,147 -149.038,146.165 -144.357,146.165 -143.451,147.07 C15.1@-140.882,147.07 -138.117,147.07 -136.988,148.2 -134.79,148.2 ; R29.2@-134.2,148.2 -134.79,148.2 ; v1(-115.511,53.939) -115.003,53.939 -114.394,54.548 -114.394,55.381 -111.879,57.896 -111.879,68.62 -119.499,76.24 -119.499,81.676 -118.813,82.361 -118.813,84.952 -118.407,85.359 -118.407,98.157 -118.89,98.64 VT18.3@-121.1,98.64 -128.592,106.132 -128.592,129.933 -128.618,129.958 -128.618,139.74 -128.364,139.994 -126.738,139.994 -125.341,141.391 -125.341,147.182 -125.9,147.741 -126.773,147.741 -126.9,147.868 R31.2@-126.9,148.3 ; R25.3@-114,150.729 R25.3@-114,150.479 ; R25.2@-113.05,148.671 R25.2@-113.05,149.214 ; v1(-102.049,49.545) -98.773,46.268 -95.623,46.268 -94.739,45.384 -94.455,17.16 -74.3,17.16 C18.1@-74.3,16.5 ; -134.79,148.2 -135.044,147.946 -135.044,146.192 -134.917,146.065 -131.082,146.065 -128.846,148.3 R31.2@-126.9,148.3 ; R31.2@-126.9,148.3 -121.709,148.3 -118.941,151.068 -114.589,151.068 R25.3@-114,150.479 ; R25.3@-114,150.479 -114,150.164 R25.2@-113.05,149.214 ; R25.3@-114,150.479 -113.05,149.529 R25.2@-113.05,149.214
  Bottom Layer w0.254: v1(-115.511,53.939) -111.117,49.545 v1(-102.049,49.545)
NetC16_2: C16.2 R20.2 R21.1 VT8.2 | length 107.4
  Top Layer w0.254: R20.2@-155.4,139.3 -153.759,137.659 -151.643,137.659 C16.2@-150.371,138.932 -150.371,141.025 -149.776,141.62 -143.832,141.62 -143.578,141.366 -143.578,140.248 -143.858,139.969 -145.077,139.969 -145.28,139.765 -145.28,132.713 -144.696,132.129 R21.1@-139.805,132.129 -139.54,132.129 v1(-139.54,133.111) ; v1(-96.436,135.244) -94.048,132.857 -94.048,116.728 -92.397,115.077 -88.156,115.077 -87.876,115.356 -87.876,117.388 -88.288,117.8 VT8.2@-90.1,117.8
  Bottom Layer w0.254: v1(-139.54,133.111) -137.406,135.244 v1(-96.436,135.244)
NetC17_1: C17.1 L5.1 | length 24.2
  Top Layer w0.254: C17.1@-87.923,135.407 -87.927,135.407 -87.927,126.779 -80.213,119.064 L5.1@-80.213,114.4
NetC17_2: C17.2 VT9.2 | length 14.8
  Top Layer w0.254: VT9.2@-91.1,123.83 -91.1,134.369 -88.562,136.907 C17.2@-87.923,136.907
NetC19_1: C19.1 C22.1 R19.2 | length 34.8
  Top Layer w0.254: C19.1@-71.7,56.5 -71.7,58.482 v1(-69.969,60.213) ; R19.2@-55.8,66.8 -55.8,63.747 v1(-55.593,63.54) ; C22.1@-51.1,71.5 -49.903,71.195 v1(-49.903,69.23)
  Bottom Layer w0.254: v1(-69.969,60.213) -58.92,60.213 v1(-55.593,63.54) v1(-49.903,69.23)
NetC20_2: C20.2 C21.1 R23.1 T1.5 | length 104.9
  Top Layer w0.254: T1.5@-80.951,68.435 -80.951,68.874 -81.35,69.273 -82.84,69.273 -82.999,69.433 -82.999,79.288 -82.745,79.542 -81.399,79.542 -81.348,79.491 -81.348,78.018 -81.196,77.866 -80.18,77.866 -80.028,78.018 -80.028,82.242 -81.95,84.165 R23.1@-81.95,87.1 -81.95,96.466 -79.672,98.744 -76.929,98.744 -76.268,98.084 -76.268,86.908 -75.049,85.688 -72.213,85.688 -72.154,85.748 -72.154,100.522 -69.664,103.012 -69.664,115.991 -70,115.991 C20.2@-70,116.2 -70,119.084 v1(-67.876,121.208)
  Bottom Layer w0.254: v1(-67.876,121.208) -60.608,121.208 C21.1@-60.1,120.7
NetC22_2: C22.2 R24.1 R26.2 VT10.2 | length 119.4
  Top Layer w0.254: C22.2@-51.1,70 C22.2@-51.122,70 ; R24.1@-49.35,128.1 -49.35,126.639 -49.116,126.405 -49.116,109.946 -51.93,107.132 VT10.2@-51.93,103.9 -51.93,98.744 -51.935,98.739 -51.935,70.144 -51.791,70 C22.2@-51.122,70 ; R26.2@-34.85,23.1 -34.85,23.078 -40.429,23.078 -50.538,33.187 -50.538,50.576 -52.631,52.669 -52.631,53.802 -52.494,53.939 -51.224,53.939 -50.945,54.218 -50.945,57.171 -50.716,57.399 -50.716,64.226 -51.122,64.632 C22.2@-51.122,70
NetC24_1: C24.1 R27.1 VT9.3 | length 63
  Top Layer w0.254: R27.1@-127.767,139.307 -126.687,139.307 -121.708,144.287 -118.788,144.287 -118.153,143.652 -118.153,141.518 -118.421,141.25 C24.1@-119,141.25 -119.601,141.25 -119.601,126.532 -118.915,125.846 -108.933,125.846 -106.621,123.535 v1(-102.964,123.535)
  Bottom Layer w0.254: v1(-102.964,123.535) -98.874,123.535 -96.157,126.253 -90.983,126.253 VT9.3@-89.83,125.1
NetC25_2: C25.2 VD4.1 VD5.2 | length 125.9
  Top Layer w0.254: C25.2@-142.571,82.88 -142.571,81.828 -142.063,81.32 -136.67,81.32 -135.397,80.047 -135.397,75.749 -135.882,75.264 -135.882,66.08 -137.254,64.708 -137.254,58.638 -134.714,56.098 v1(-134.714,54.32) ; v1(-65.753,54.828) -64.635,53.71 VD4.1@-61.816,53.71 ; VD4.1@-61.816,53.5 VD4.1@-61.816,53.71 ; VD5.2@-56.2,57.884 -60.23,57.884 -61.816,56.298 VD4.1@-61.816,53.71
  Bottom Layer w0.254: v1(-134.714,54.32) -133.622,53.228 -117.696,53.228 -115.969,54.955 -115.003,54.955 -113.225,53.177 -105.504,53.177 -105.013,52.686 -98.605,52.686 -95.498,49.578 -94.554,49.578 -92.844,47.868 -85.514,47.868 -78.554,54.828 v1(-65.753,54.828)
NetC26_1: C26.1 R23.2 R33.2 VT13.1 | length 89.5
  Top Layer w0.254: v1(-83.642,90.261) v1@-84.081,90.7 ; R23.2@-83.45,87.1 -83.45,89.931 -83.689,90.222 v1@-84.081,90.7 ; VT13.1@-38,91.76 -36.39,91.76 -35.784,92.366 -35.784,93.969 -38.27,96.455 -38.27,109.844 -33.214,114.9 C26.1@-29.4,114.9 ; v1@-84.081,90.7 -84.15,90.769 R33.2@-84.15,93.5 v1@-84.081,90.7
  Bottom Layer w0.254: v1(-83.642,90.261) -82.217,88.836 -55.824,88.836 -53.713,90.947 -38.813,90.947 VT13.1@-38,91.76
NetC27_2: C27.2 DD4.4 ZQ1.2 | length 104.4
  Top Layer w0.254: DD4.4@-155.105,72.34 -157.65,72.34 -157.675,72.315 DD4.4@-160.205,72.315 -162.056,72.315 -164.102,74.36 -164.102,75.1 ZQ1.2@-164.1,75.1 -162.984,75.1 -162.374,75.71 -162.374,150.408 -161.511,151.272 -149.785,151.272 -147.084,148.57 C27.2@-146.724,148.57
NetC28_2: C28.2 DD4.5 ZQ1.1 | length 13.2
  Top Layer w0.254: C28.2@-164.1,68.1 -163.746,68.454 -163.746,69.158 -164.1,69.512 ZQ1.1@-164.1,71.7 -162.476,71.7 -161.851,71.075 DD4.5@-160.2,71.075 -157.675,71.075 -157.65,71.1 DD4.5@-155.1,71.1
NetC29_1: C29.1 R32.1 VT12.3 | length 57.8
  Top Layer w0.254: v1(-73.246,86.705) -73.1,86.851 R32.1@-73.1,88.1 -73.1,102.442 -70.172,105.37 -70.172,111.902 -70.782,112.511 -70.782,135.407 C29.1@-70.778,135.407
  Bottom Layer w0.254: v1(-73.246,86.705) -70.83,84.289 VT12.3@-70.83,80.1
NetC29_2: C29.2 C31.1 R41.2 VT17.2 | length 93.9
  Top Layer w0.254: R41.2@-117.1,128.35 -116.502,128.35 -116.248,128.604 -116.248,132.171 -117.112,133.034 -117.112,134.1 C31.1@-117.1,134.1 -114.164,134.1 -107.307,127.243 -103.483,127.243 -101.948,125.708 -101.948,119.739 -97.687,115.479 -97.687,114.194 ; v1(-99.509,116.016) -97.687,114.194 ; VT17.2@-97.687,107.427 -97.687,114.194 ; v1(-72.179,121.808) -72.179,136.272 -71.544,136.907 C29.2@-70.778,136.907
  Bottom Layer w0.254: v1(-99.509,116.016) -93.794,116.016 -88.003,121.808 v1(-72.179,121.808)
NetC30_1: C30.1 R35.1 R37.1 VT12.2 | length 158
  Top Layer w0.254: R35.1@-158.471,123.856 -158.471,116.939 -156.888,115.356 v1(-156.888,105.196) -156.888,104.231 -154.526,101.869 -154.526,98.988 -155.364,98.15 R37.1@-156.071,98.15 ; C30.1@-77.8,98 -77.818,98 -77.818,81.548 -75.1,78.83 VT12.2@-72.1,78.83
  Bottom Layer w0.254: v1(-156.888,105.196) -147.744,96.052 -122.808,96.052 -121.91,95.154 -109.755,95.154 -108.73,96.179 -97.629,96.179 -94.531,93.081 -94.531,88.33 -94.404,88.203 -90.34,88.203 -88.308,90.235 -88.308,91.963 -87.8,92.471 -85.768,92.471 -85.26,91.963 -85.26,87.848 -76.242,78.83 VT12.2@-72.1,78.83
NetC31_2: C31.2 C34.2 R34.1 | length 91.3
  Top Layer w0.254: C31.2@-117.1,135.6 -113.276,135.6 -111.041,137.835 -109.009,137.835 -108.081,136.907 C34.2@-104.687,136.907 -103.509,136.907 -102.786,136.184 -102.786,132.653 v1(-99.078,128.945) ; R34.1@-71.05,95.071 -71.05,100.827 -69.156,102.721 -69.156,107.228 -68.902,107.482 -65.88,107.482 -65.626,107.228 -64.508,107.228 -64.254,107.482 -64.254,110.022 -67.074,112.841 v1(-67.074,118.429)
  Bottom Layer w0.254: v1(-99.078,128.945) -81.094,128.945 -75.049,122.9 -71.544,122.9 v1(-67.074,118.429)
NetC32_1: C32.1 R37.2 R37.3 | length 19.4
  Top Layer w0.254: R37.3@-158.129,99.1 -157.599,99.1 -156.649,100.05 R37.2@-156.071,100.05 -156.071,99.637 -157.117,98.592 -157.117,97.576 -156.99,97.449 -154.856,97.449 -153.992,96.585 -153.992,94.401 -153.505,93.913 -151.776,93.913 -150.1,95.59 C32.1@-150.1,99.1
NetC35_1: C35.1 DD4.1 R43.1 SB1.2 | length 125.5
  Top Layer w0.254: DD4.1@-160.205,76.125 -157.65,76.15 -156.061,76.15 ; v1(-159.58,79.669) -156.061,76.15 ; DD4.1@-155.105,76.15 -156.061,76.15 ; SB1.2@-117.6,84.1 -117.6,97.576 -116.832,98.344 -116.832,99.608 -118.065,100.841 -118.065,109.462 -115.177,112.35 -108.67,112.35 ; v1(-109.263,112.943) -108.67,112.35 ; R43.1@-108.1,112.35 -108.67,112.35
  Bottom Layer w0.254: v1(-159.58,79.669) -130.837,79.669 -127.561,82.946 -118.754,82.946 SB1.2@-117.6,84.1 ; v1(-109.263,112.943) -105.157,117.049 -94.133,117.049 -87.082,124.1 C35.1@-80.5,124.1
NetC38_1: C38.1 DD7.3 DD7.13 | length 63.7
  Top Layer w0.254: DD7.3@-153.98,120.67 -154.1,120.67 -154.1,120.975 -154.661,121.536 -154.661,122.358 -154.475,122.544 -150.533,122.544 -149.928,121.94 DD7.13@-148.9,121.94 -147.165,121.94 v1(-147.16,121.935) ; C38.1@-102.64,105.129 -102.583,105.129 v1(-102.583,106.11)
  Bottom Layer w0.254: v1(-147.16,121.935) -129.712,121.935 -126.883,119.106 -116.922,119.106 -109.629,111.813 -105.516,111.813 -104.783,111.079 -104.783,108.311 v1(-102.583,106.11)
NetC38_2: C38.2 DD7.5 DD7.6 R50.1 | length 101.3
  Top Layer w0.254: DD7.5@-153.975,118.165 DD7.6@-153.975,116.895 -152.722,116.895 -149.126,113.299 v1(-146.068,113.299) ; v1(-106.012,108.117) -106.012,105.806 -104.691,104.485 -102.837,104.18 -102.837,103.629 C38.2@-102.64,103.629 -95.641,103.629 -94.226,105.044 -94.226,112.918 -94.59,113.281 -94.59,126.484 -98.849,130.743 -98.849,135.407 R50.1@-98.845,135.407
  Bottom Layer w0.254: v1(-146.068,113.299) -145.696,113.67 -113.114,113.67 -107.561,108.117 v1(-106.012,108.117)